# Altium PCB PCB.PcbDoc
Units mm, origin at the board's own origin, x right, y up, seen from the top; angles counter-clockwise.
Board outline 59.94 x 28.19 mm, 2 copper layers (Top Layer, Bottom Layer); 7 components, 5 nets, 20 pads, 0 vias.
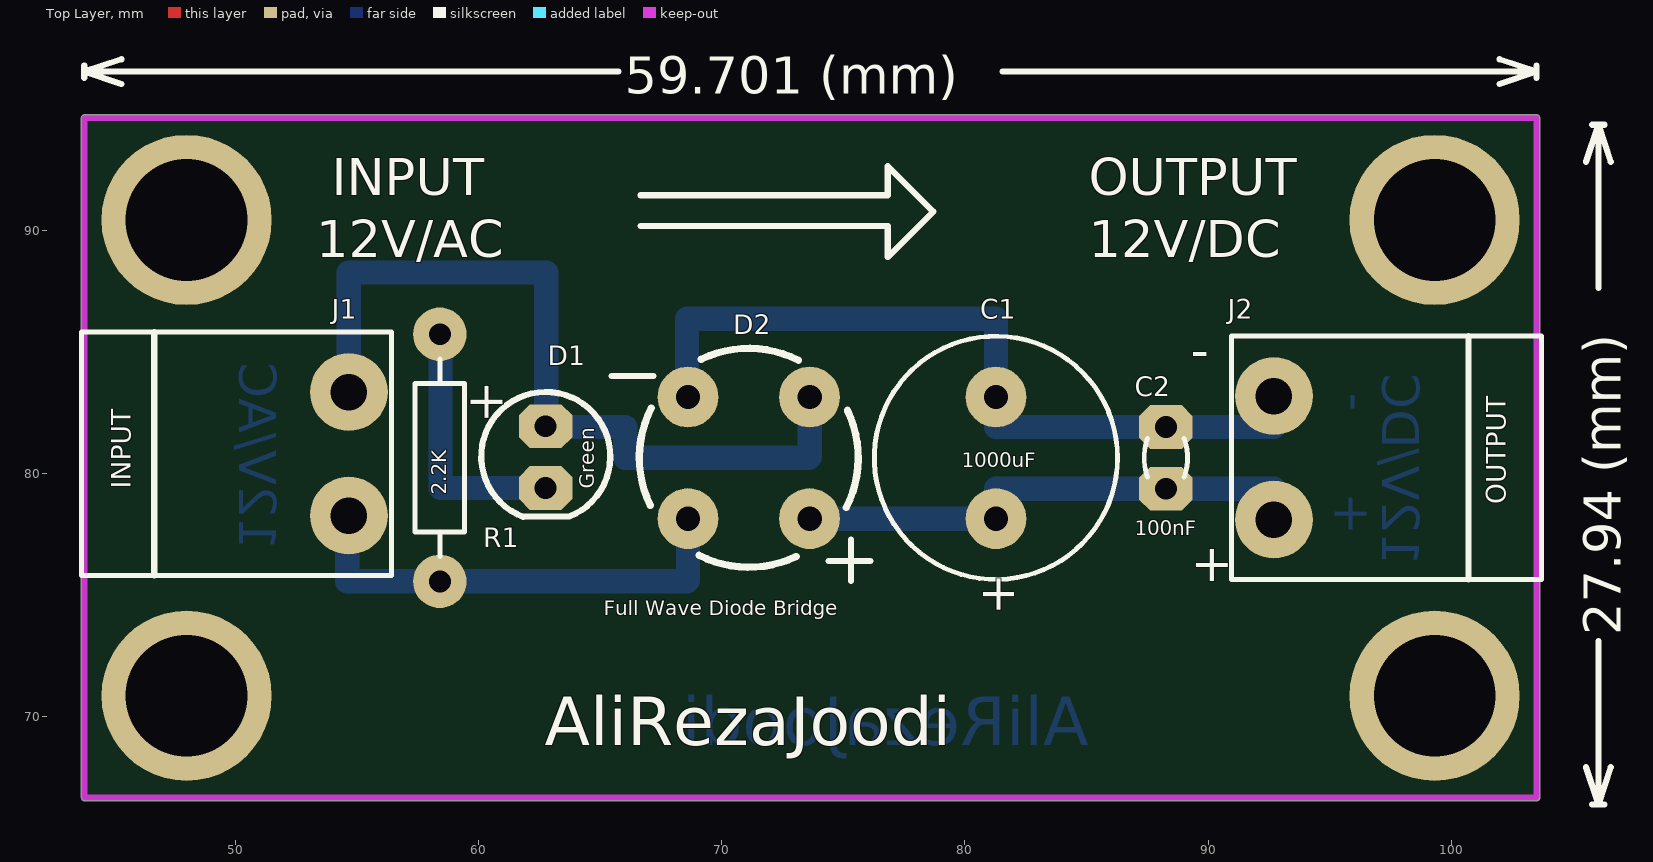
[diagram p0: Top Layer view]
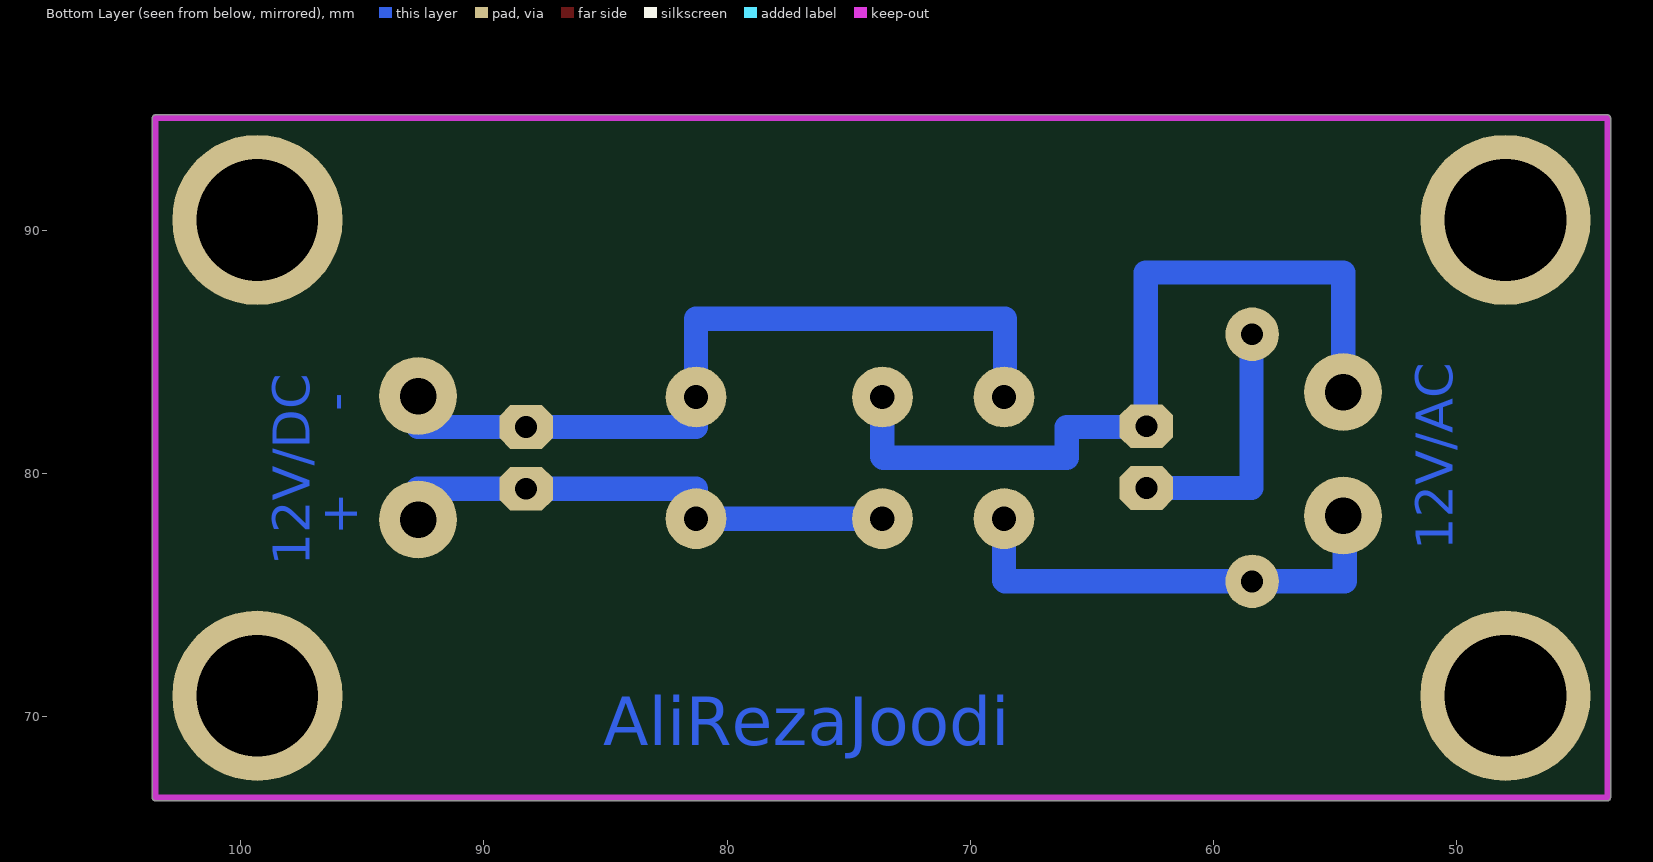
[diagram p1: Bottom Layer view, seen from below]

## Layer stack, top to bottom
Top Solder: solder mask 0.0102, Solder Resist, Dk 3.5
Top Layer: signal copper 0.0356
Dielectric 1: dielectric 0.32, FR-4, Dk 4.8
Bottom Layer: signal copper 0.0356
Bottom Solder: solder mask 0.0102, Solder Resist, Dk 3.5

## Board outline
43.815,66.548 cw(c43.815,66.675) 43.688,66.675 43.688,94.615 cw(c43.815,94.615) 43.815,94.742 103.505,94.742 cw(c103.505,94.615) 103.632,94.615 103.632,66.675 cw(c103.505,66.675) 103.505,66.548

## Design rules (kind name [scope] priority, off if disabled: settings)
Clearance [All] p1: gap=0.254
Height [All] p1: minheight=0 maxheight=30 prefheight=12.7
PolygonConnect [All] p1: connectstyle=Relief reliefconductorwidth=0.254 reliefentries=4 polygonreliefangle="90 Angle" airgapwidth=0.254
RoutingCorners [All] p1: cornerstyle=90-Degree minsetback=2.54 maxsetback=2.54
RoutingVias [All] p1: holewidth=0.711 width=1.27 viastyle="Through Hole" minholewidth=0.711 minwidth=1.27 maxholewidth=1 maxwidth=1.27
SolderMaskExpansion [All] p1: expansion=0.102
Width [All] p1: maxlimit=1.5 minlimit=0.254 preferedwidth=1
28 further rules are at their usual default settings.

## Components (designator, comment, footprint, x,y, rotation, side; value= is the part's Value field where it differs from the comment)
C1 "Cap Pol1" CAPPR5-10x5 81.28,80.645 r90 top
C2 "Cap" CAPNTO2.54-3.05x1.78A 88.265,80.645 r270 top (schematic designator C13)
D1 "LED" LED-5mm_Red 62.865,80.645 r270 top (schematic designator DS?)
D2 "Bridge1" BRIDGE-1 71.12,80.645 r180 top (schematic designator D1)
J1 "Header 2" "W2312R5MILH - duplicate" 54.68,80.809 r270 top
J2 "Header 2" "W2312R5MILH - duplicate" 92.71,80.645 r90 top
R1 "Res1" AXIAL-0.4 58.42,80.645 r270 top (schematic designator R26)

## Footprints (in the part's own frame and the unit in brackets; to place one, negate y for a bottom-side part, rotate by r counter-clockwise, add the part's x,y. Pads: shape width x height; smd on the part's side, far side on the other; paste and mask are expansions set on the pad)
AXIAL-0.4 [mm] "Axial Device, Thru-Hole; 2 Leads; 0.4 in Pin Spacing"
  round 2.2 hole 0.9: 1(-5.08,0) 2(5.08,0)
  silkscreen extent -4.06,-1.02 4.06,1.02
BRIDGE-1 [mm] "created by: M.Hariri (designer)"
  round 2.5 hole 1: 1(2.5,-2.5) 2(-2.5,-2.5) 3(-2.5,2.5) 4(2.5,2.5)
  silkscreen extent -5,-4.5 5.64,5.07
CAPNTO2.54-3.05x1.78A [mm] "Capacitor, Radial, Tantalum, Non-Polarised; Body 3.05 x 1.78 x 3.43 mm (WxTxH max); Pin Spacing 2.54 mm (typ)"
  oct 1.8x2.2 hole 0.9: 1(-1.27,0) 2(1.27,0)
  silkscreen extent -0.8,-0.89 0.8,0.89
CAPPR5-10x5 [mm] "Capacitor, Electrolytic, Radial; Body 10 x 5 mm (Dia.xH typ); Pin Spacing 5 mm (typ)"
  round 2.5 hole 1: 1(-2.5,0) 2(2.5,0)
  silkscreen extent -5,-5 5,5
LED-5mm_Red [mm]
  oct 1.8x2.2 hole 0.9: 1(-1.3,-0.1) 2(1.24,-0.1)
  silkscreen extent -2.71,-2.74 2.43,2.56, body extent -2.6,-2.64 2.48,2.46, height 9.6
"W2312R5MILH - duplicate" [mm]
  round 3.2 hole 1.5: 1(-2.54,0) 2(2.54,0)
  silkscreen extent -5,-11 5,1.75

## Part data
C1: "Polarized Capacitor (Radial)"
C2: "Capacitor"
D1: "Typical INFRARED GaAs LED"
D2: "Full Wave Diode Bridge"
J1 J2: "Header, 2-Pin"
R1: "Resistor"

## Free pads (board coordinates)
  round 7 hole 5: 1(48.006,70.866) 3(99.314,90.424) 4(99.314,70.866) 5(48.006,90.424)

## Nets (pads, with @x,y where several pads share a name; then routed paths per layer and width w, separated by ;. In a path a pad name is that pad's centre, name@x,y a point inside that pad or via, vN(x,y) a via of type N, cw(c..) or ccw(c..) an arc to the next point about the centre after c; other vN are vias at no path point)
GND: C1.2 C2.1 D2.1 J2.2 | length 33.3
  Bottom Layer w1: D2.1@67.985,83.145 68.58,83.74 68.58,86.36 81.28,86.36 C1.2 81.28,81.915 C2.1 92.71,81.915 J2.2
NetC1_1: C1.1 C2.2 D2.3 J2.1 | length 21.6
  Bottom Layer w1: D2.3 C1.1 81.28,79.375 C2.2 92.71,79.375 J2.1
NetD1_1: D1.1 D2.2 J1.1 | length 33.9
  Bottom Layer w1: J1.1 54.68,88.265 62.795,88.265 D1.1@62.795,81.975 ; D1.1 62.795,81.915 66.04,81.915 66.04,80.645 73.58,80.645 ; 73.62,80.685 D2.2
NetD1_2: D1.2 R1.1 | length 10.6
  Bottom Layer w1: R1.1@58.45,85.695 58.45,79.405 D1.2
NetD2_4: D2.4 J1.2 R1.2 | length 19.2
  Bottom Layer w1: J1.2@54.61,78.199 54.61,75.565 R1.2 68.58,75.565 68.62,75.605 D2.4

## Keep-outs
Keep-Out Layer:
  lines w0.254: 43.815,66.675 103.505,66.675 103.505,94.615 43.815,94.615 43.815,66.675

## Other copper
Bottom Layer:
  text "-" at 96.52,82.55 h1.52 r90
  text "+" at 96.52,77.47 h1.52 r90
  text "12V/AC" at 50.165,76.835 h1.52 r270
  text "12V/DC" at 97.155,76.2 h1.52 r270
  text "AliRezaJoodi" at 85.09,68.834 h2

## Silkscreen, mask and mechanical layers (free items; w line width, h text height)
Top Overlay:
  lines w0.254: 43.804,96.266 43.804,96.774 ; 45.328,96.012 43.804,96.52 ; 45.328,97.028 43.804,96.52 ; 65.757,96.52 43.804,96.52 ; 66.675,90.17 76.835,90.17 76.835,88.9 78.702,90.767 76.835,92.634 76.835,91.44 66.675,91.44 ; 81.551,96.52 103.505,96.52 ; 101.981,96.012 103.505,96.52 ; 101.981,97.028 103.505,96.52 ; 103.505,96.266 103.505,96.774 ; 105.537,67.922 106.045,66.398 ; 105.537,92.814 106.045,94.338 ; 105.791,66.398 106.299,66.398 ; 105.791,94.338 106.299,94.338 ; 106.045,73.106 106.045,66.398 ; 106.045,87.63 106.045,94.338 ; 106.553,67.922 106.045,66.398 ; 106.553,92.814 106.045,94.338
  text "59.701 (mm)" at 66.011,95.606 h1.52
  text "INPUT" at 53.975,91.44 h1.52
  text "OUTPUT" at 85.09,91.44 h1.52
  text "12V/AC" at 53.34,88.9 h1.52
  text "12V/DC" at 85.09,88.9 h1.52
  text "-" at 89.281,84.328 h1.52
  text "1000uF" at 79.883,80.264 h0.6
  text "INPUT" at 45.72,79.375 h0.8 r90
  text "Green" at 64.77,79.375 h0.6 r90
  text "2.2K" at 58.674,79.121 h0.6 r90
  text "OUTPUT" at 102.235,78.74 h0.8 r90
  text "100nF" at 86.995,77.47 h0.6
  text "+" at 89.281,75.565 h1.52
  text "Full Wave Diode Bridge" at 65.151,74.168 h0.6
  text "27.94 (mm)" at 106.959,73.36 h1.52 r90
  text "AliRezaJoodi" at 62.738,68.834 h2

## Text inside footprints (layer, text, board x,y; h text height)
C1: Top Overlay "+" at 82.03,74.17 h1.5 r90
D1: Top Overlay "+" at 59.69,83.82 h1.52 r270